# Altium PCB Grabber_DIOT.PCBDOC (part 6 of 7)
Units mm, origin at the board's own origin, x right, y up, seen from the top; angles counter-clockwise.
Board outline 222.9 x 100 mm, 4 copper layers (L1, P2, P3, L4), stack 1.6 mm thick; 235 components, 180 nets, 1032 pads, 664 vias.
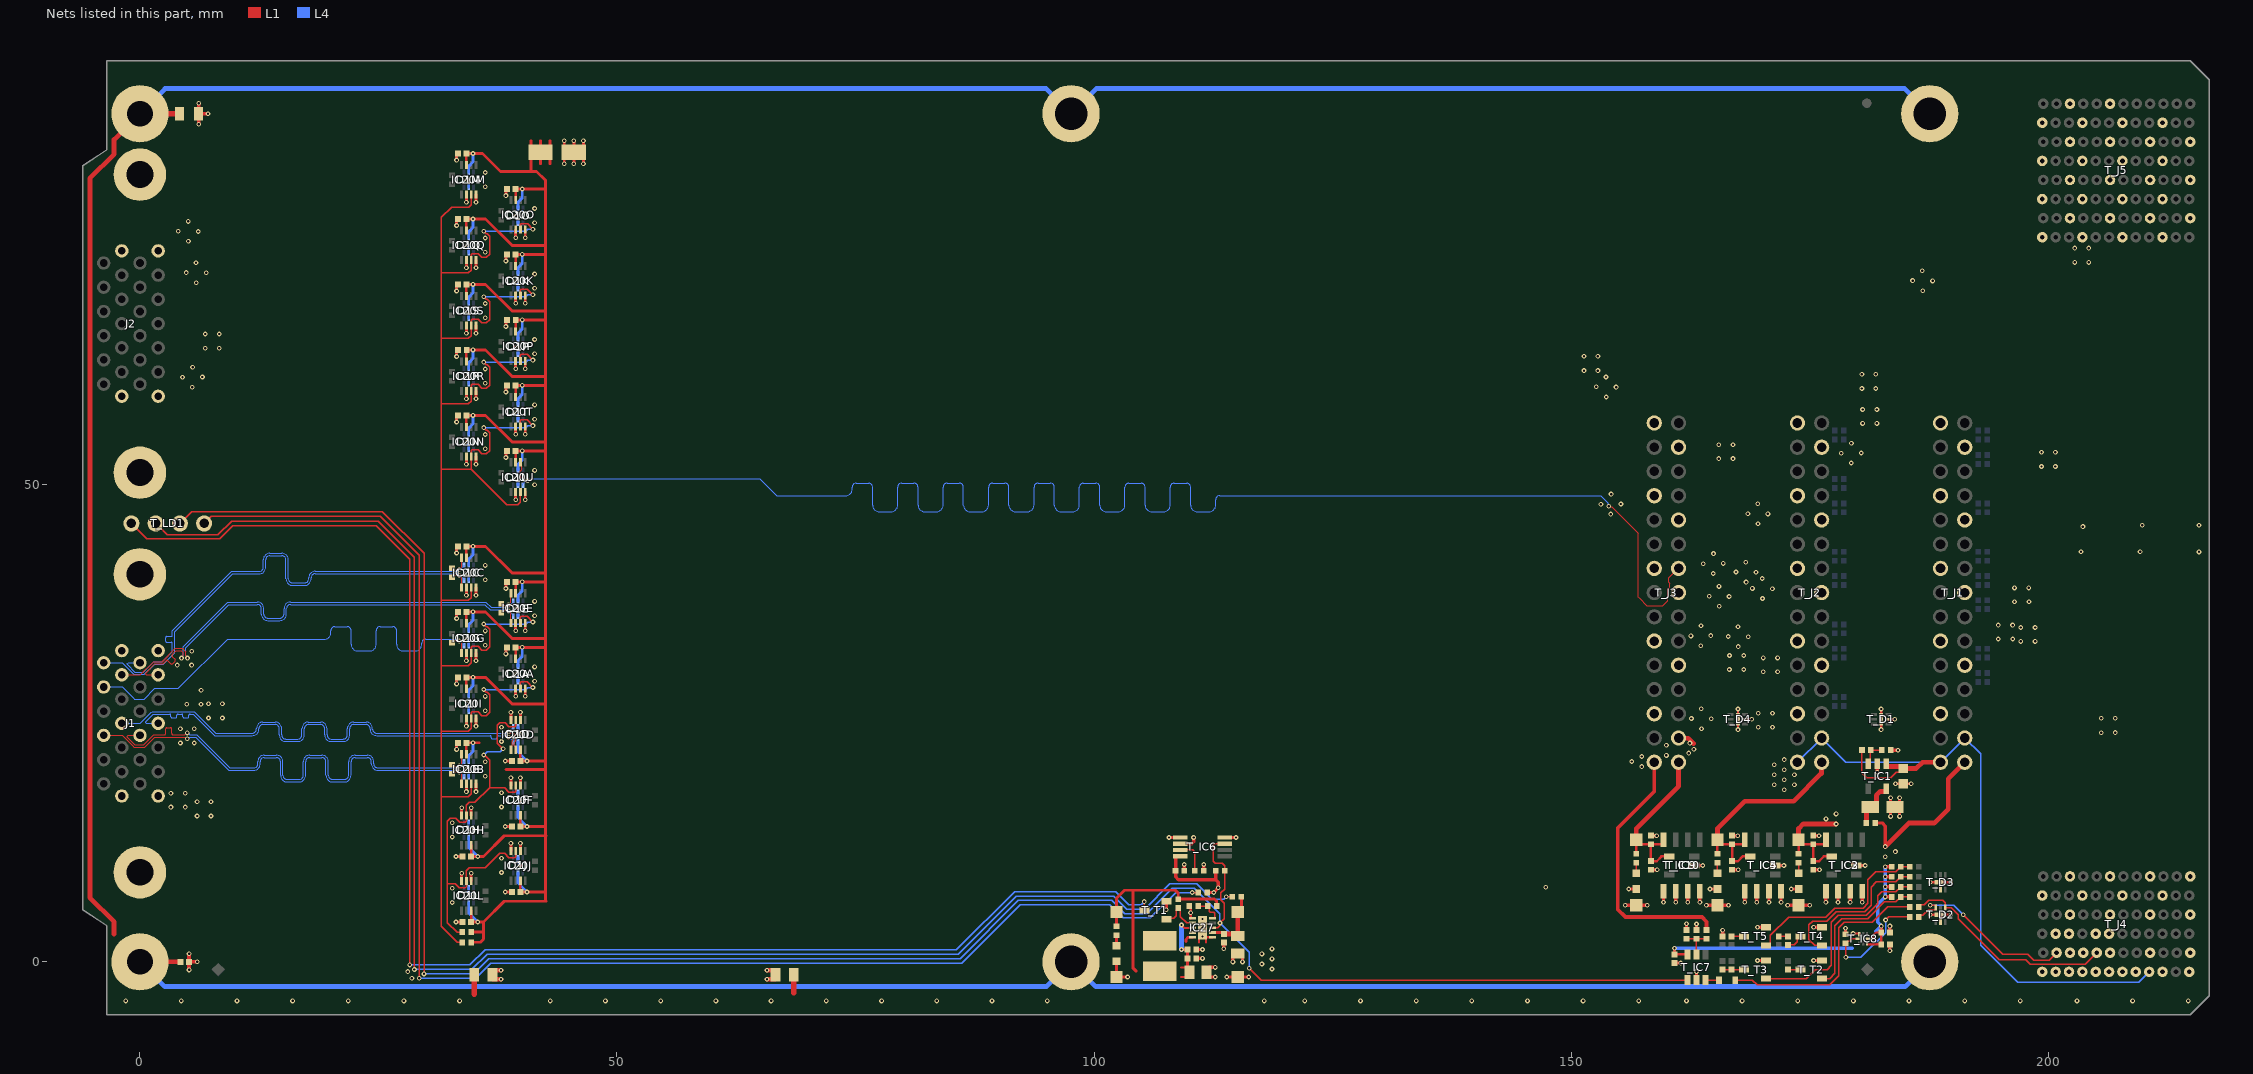
[diagram p7: the nets of this part, all layers, seen from the top]

## Via types
v1: diameter 0.5, hole 0.25, L1 to L4, tented both sides, 661 vias
v2: diameter 0.5, hole 0.25, L1 to L4, 3 vias

## Nets (pads, with @x,y where several pads share a name; then routed paths per layer and width w, separated by ;. In a path a pad name is that pad's centre, name@x,y a point inside that pad or via, vN(x,y) a via of type N, cw(c..) or ccw(c..) an arc to the next point about the centre after c; other vN are vias at no path point) (continued)
EEM_IO.LVDS_P20: D1U.1 IC20U.6 T_J3.14 | length 176.2
  L1 w0.127: IC20U.6@39.878,52.372 39.878,52.097 40.003,51.971 40.003,51.566 39.868,51.432 39.868,50.854 40.092,50.631 40.372,50.631 40.558,50.445 v1(40.633,50.445) ; v1(153.962,47.757) 154.016,47.704 154.278,47.704 154.477,47.505 154.696,47.286 157.059,44.923 157.059,38.229 157.134,38.154 157.952,37.336 159.611,37.336 160.127,37.852 160.127,39.019 160.364,39.256 160.364,39.685 160.344,39.705 160.269,39.78 160.269,40.239 T_J3.14@161.27,41.24
  L4 w0.127: D1U.1@40.13,49.969 40.13,50.104 40.217,50.19 40.277,50.19 40.532,50.445 v1(40.633,50.445) 40.708,50.445 40.894,50.631 64.959,50.631 66.722,48.868 73.793,48.868 73.983,48.868 ccw(c73.983,49.548) 74.663,49.548 74.663,49.746 cw(c75.088,49.746) 75.088,50.172 76.364,50.172 cw(c76.364,49.746) 76.79,49.746 76.79,47.873 ccw(c77.469,47.873) 77.469,47.194 78.745,47.194 ccw(c78.745,47.873) 79.425,47.873 79.425,49.746 cw(c79.85,49.746) 79.85,50.172 81.126,50.172 cw(c81.126,49.746) 81.552,49.746 81.552,47.873 ccw(c82.231,47.873) 82.231,47.194 83.507,47.194 ccw(c83.507,47.873) 84.187,47.873 84.187,49.746 cw(c84.612,49.746) 84.612,50.172 85.888,50.172 cw(c85.888,49.746) 86.314,49.746 86.314,47.873 ccw(c86.993,47.873) 86.993,47.194 88.269,47.194 ccw(c88.269,47.873) 88.949,47.873 88.949,49.746 cw(c89.374,49.746) 89.374,50.172 90.65,50.172 cw(c90.65,49.746) 91.076,49.746 91.076,47.873 ccw(c91.755,47.873) 91.755,47.194 93.031,47.194 ccw(c93.031,47.873) 93.711,47.873 93.711,49.746 cw(c94.136,49.746) 94.136,50.172 95.412,50.172 cw(c95.412,49.746) 95.838,49.746 95.838,47.873 ccw(c96.517,47.873) 96.517,47.194 97.793,47.194 ccw(c97.793,47.873) 98.473,47.873 98.473,49.746 cw(c98.898,49.746) 98.898,50.172 100.174,50.172 cw(c100.174,49.746) 100.6,49.746 100.6,47.873 ccw(c101.279,47.873) 101.279,47.194 102.555,47.194 ccw(c102.555,47.873) 103.235,47.873 103.235,49.746 cw(c103.66,49.746) 103.66,50.172 104.936,50.172 cw(c104.936,49.746) 105.362,49.746 105.362,47.873 ccw(c106.041,47.873) 106.041,47.194 107.317,47.194 ccw(c107.317,47.873) 107.997,47.873 107.997,49.746 cw(c108.422,49.746) 108.422,50.172 109.698,50.172 cw(c109.698,49.746) 110.124,49.746 110.124,47.873 ccw(c110.803,47.873) 110.803,47.194 112.079,47.194 ccw(c112.079,47.873) 112.759,47.873 112.759,48.443 cw(c113.184,48.443) 113.184,48.868 115.338,48.868 153.114,48.868 153.909,48.073 153.909,47.811 v1(153.962,47.757)
GA0: T_R13.1 T_R31.1 T_T2.1 | length 15.7
  L1 w0.152: T_T2.1@176.332,-1.764 177.109,-1.764 177.667,-1.206 177.667,3.792 178.385,4.51 181.086,4.51 182.853,6.277 184.031,6.277 184.54,6.787 T_R31.1@184.54,6.807 T_R13.1@185.51,6.807
GA1: T_R14.1 T_R32.1 T_T3.1 | length 22.2
  L1 w0.152: T_T3.1@170.448,-1.764 174.672,-1.764 175.622,-0.814 176.838,-0.814 177.274,-0.378 177.274,4.132 178.02,4.879 180.933,4.879 182.161,6.106 182.161,6.928 182.564,7.332 184.031,7.332 184.54,7.841 T_R32.1@184.54,7.861 T_R14.1@185.51,7.861
GA2: T_R16.1 T_R33.1 T_T4.1 | length 17
  L1 w0.152: T_T4.1@176.332,1.713 175.55,1.713 174.938,2.325 174.938,3.873 175.332,4.267 176.782,4.267 177.788,5.273 180.77,5.273 181.45,5.952 181.45,7.824 182.011,8.386 184.031,8.386 184.54,8.895 T_R33.1@184.54,8.915 T_R16.1@185.51,8.915
GA3: T_R18.1 T_R34.1 T_T5.1 | length 20.4
  L1 w0.152: T_T5.1@170.448,1.713 170.648,1.713 170.897,1.962 170.897,2.767 172.814,4.684 176.683,4.684 177.637,5.638 180.619,5.638 181.107,6.126 181.107,8.59 181.956,9.44 184.031,9.44 184.54,9.949 T_R34.1@184.54,9.969 T_R18.1@185.51,9.969
GND: C47A.1 C47B.1 C47C.1 C47D.1 C47E.1 C47F.1 C47G.1 C47H.1 C47I.1 C47J.1 C47K.1 C47L.1 C47M.1 C47N.1 C47O.1 C47P.1 C47Q.1 C47R.1 C47S.1 C47T.1 C47U.1 C59.1 C62.2 C65.1 C66.1 C67.1 C68.1 D1A.2 D1B.2 D1C.2 D1D.2 D1E.2 D1F.2 D1G.2 D1H.2 D1I.2 D1J.2 D1K.2 D1L.2 D1M.2 D1N.2 D1O.2 D1P.2 D1Q.2 D1R.2 D1S.2 D1T.2 D1U.2 IC20A.2 IC20A.4 IC20B.2 IC20B.4 IC20C.2 IC20C.4 IC20D.2 IC20D.4 IC20E.2 IC20E.4 IC20F.2 IC20F.4 IC20G.2 IC20G.4 IC20H.2 IC20H.4 IC20I.2 IC20I.4 IC20J.2 IC20J.4 IC20K.2 IC20K.4 IC20L.2 IC20L.4 IC20M.2 IC20M.4 IC20N.2 IC20N.4 IC20O.2 IC20O.4 IC20P.2 IC20P.4 IC20Q.2 IC20Q.4 IC20R.2 IC20R.4 IC20S.2 IC20S.4 IC20T.2 IC20T.4 IC20U.2 IC20U.4 IC27.1 IC27.6 IC27.11 J1.1 J1.13 J1.14 J1.26 J1.27 J1.28 J2.1 J2.13 J2.14 J2.26 J2.27 J2.28 R122.1 T_C1.1 T_C2.2 T_C3.1 T_C4.1 T_C5.1 T_C6.1 T_C7.1 T_C8.1 T_C9.1 T_C12.2 T_C13.2 T_C16.1 T_C20.1 T_C22.1 T_C23.1 T_D1.2 T_D1.7 T_D2.2 T_D2.7 T_D3.2 T_D3.7 T_D4.2 T_D4.7 T_IC1.2 T_IC2.2 T_IC3.1 T_IC3.2 T_IC3.3 T_IC3.4 T_IC4.2 T_IC5.1 T_IC5.2 T_IC5.3 T_IC5.4 T_IC6.4 T_IC6.5 T_IC6.6 T_IC7.2 T_IC8.4 T_IC9.2 T_IC10.1 T_IC10.2 T_IC10.3 T_IC10.4 T_J1.1 T_J1.4 T_J1.7 T_J1.10 T_J1.13 T_J1.16 T_J1.19 T_J1.22 T_J1.25 T_J2.1 T_J2.4 T_J2.7 T_J2.10 T_J2.13 T_J2.16 T_J2.19 T_J2.22 T_J2.25 T_J3.1 T_J3.4 T_J3.7 T_J3.10 T_J3.13 T_J3.16 T_J3.19 T_J3.22 T_J3.25 T_J4.A2 T_J4.A4 T_J4.A6 T_J4.C1 T_J4.C5 T_J4.D2 T_J4.D4 T_J4.D6 T_J4.F1 T_J4.F5 T_J4.G2 T_J4.G4 T_J4.G6 T_J4.I1 T_J4.I5 T_J4.J2 T_J4.J4 T_J4.J6 T_J4.L1 T_J4.L5 T_J5.A2 T_J5.A4 T_J5.A6 T_J5.C1 T_J5.C3 T_J5.C5 T_J5.C7 T_J5.D2 T_J5.D4 T_J5.D6 T_J5.F1 T_J5.F3 T_J5.F5 T_J5.F7 T_J5.G2 T_J5.G4 T_J5.G6 T_J5.G8 T_J5.I1 T_J5.I3 T_J5.I5 T_J5.I7 T_J5.J2 T_J5.J4 T_J5.J6 T_J5.J8 T_J5.L1 T_J5.L3 T_J5.L5 T_J5.L7 T_LD3.1 T_LD4.1 T_LD5.1 T_LD6.1 T_R7.1 T_R19.1 T_R25.1 T_R26.2 T_R27.2 T_R30.1 T_T1.2 T_T2.2 T_T3.2 T_T4.2 T_T5.2 T_TP6.1 T_TP7.1 T_TP8.1 T_TP9.1 T_TP10.1 | length 156.9
  L1 w0.152: IC20B.2@34.177,18.701 IC20B.2@34.218,18.66 ; IC20I.2@34.177,25.565 IC20I.2@34.218,25.524 ; IC20G.2@34.177,32.428 IC20G.2@34.218,32.387 ; IC20C.2@34.177,39.292 IC20C.2@34.218,39.251 ; IC20N.2@34.177,53.02 IC20N.2@34.218,52.979 ; IC20R.2@34.177,59.884 IC20R.2@34.218,59.843 ; IC20S.2@34.177,66.747 IC20S.2@34.218,66.706 ; IC20Q.2@34.177,73.611 IC20Q.2@34.218,73.57 ; IC20M.2@34.177,80.475 IC20M.2@34.218,80.434 ; IC20L.2@34.715,8.47 IC20L.2@34.756,8.429 ; IC20H.2@34.715,15.334 IC20H.2@34.756,15.293 ; IC20A.2@39.339,28.708 IC20A.2@39.38,28.667 ; IC20E.2@39.339,35.572 IC20E.2@39.38,35.531 ; IC20U.2@39.339,49.3 IC20U.2@39.38,49.259 ; IC20T.2@39.339,56.164 IC20T.2@39.38,56.122 ; IC20P.2@39.339,63.027 IC20P.2@39.38,62.986 ; IC20K.2@39.339,69.891 IC20K.2@39.38,69.85 ; IC20O.2@39.339,76.755 IC20O.2@39.38,76.714 ; IC20J.2@39.878,11.614 IC20J.2@39.919,11.573 ; IC20F.2@39.878,18.477 IC20F.2@39.919,18.436 ; IC20D.2@39.878,25.341 IC20D.2@39.919,25.3
  L1 w0.2: 111.001,2.024 111.001,3.201 v2(111.369,3.569) ; 111.737,2.024 IC27.11@111.737,3.201
  L1 w0.25: R122.1@109.968,5.85 110.124,5.694 v1(110.124,5.144) 110.124,4.594 IC27.6@110.149,4.569 ; IC27.11@111.759,2.569 IC27.1@112.419,2.569 ; v1(167.5,24.345) v1(167.5,26.497) ; T_D4.2@168.259,25.421 v1(168.945,25.421) ; v1(179.571,2.974) T_IC8.4@180.222,2.974 ; v1(182.5,24.345) T_D1.7@182.5,25.421 v1(182.5,26.497) ; T_D1.2@183.26,25.421 v1(183.945,25.421) ; v1(187.654,4.933) T_D2.7@188.731,4.933 v1(189.807,4.933) ; v1(187.654,8.332) T_D3.7@188.731,8.332 v1(189.807,8.332) ; T_D2.2@188.731,4.173 T_D2.7@188.731,4.859 ; T_D3.2@188.731,7.572 T_D3.7@188.731,8.257
  L1 w0.3: v1(33.123,4.173) C47L.1@33.815,4.173 ; v1(33.123,11.037) C47H.1@33.815,11.037 ; v1(33.191,22.264) C47B.1@33.191,22.957 ; v1(33.191,29.128) C47I.1@33.191,29.82 ; v1(33.191,35.992) C47G.1@33.191,36.684 ; v1(33.191,42.856) C47C.1@33.191,43.548 ; v1(33.191,56.583) C47N.1@33.191,57.276 ; v1(33.191,63.447) C47R.1@33.191,64.139 ; v1(33.191,70.311) C47S.1@33.191,71.003 ; v1(33.191,77.175) C47Q.1@33.191,77.867 ; v1(33.191,84.038) C47M.1@33.191,84.731 ; IC20L.4@33.715,8.47 v1(33.715,9.289) ; IC20H.4@33.715,15.334 v1(33.715,16.153) ; v1(34.218,17.84) IC20B.2@34.218,18.66 ; v1(34.218,24.704) IC20I.2@34.218,25.524 ; v1(34.218,31.568) IC20G.2@34.218,32.387 ; v1(34.218,38.432) IC20C.2@34.218,39.251 ; v1(34.218,52.159) IC20N.2@34.218,52.979 ; v1(34.218,59.023) IC20R.2@34.218,59.843 ; v1(34.218,65.887) IC20S.2@34.218,66.706 ; v1(34.218,72.751) IC20Q.2@34.218,73.57 ; v1(34.218,79.615) IC20M.2@34.218,80.434 ; IC20L.2@34.715,8.47 v1(34.715,9.289) ; IC20H.2@34.715,15.334 v1(34.715,16.153) ; v1(35.218,17.84) IC20B.4@35.218,18.66 ; v1(35.218,24.704) IC20I.4@35.218,25.524 ; v1(35.218,31.568) IC20G.4@35.218,32.387 ; v1(35.218,38.432) IC20C.4@35.218,39.251 ; v1(35.218,52.159) IC20N.4@35.218,52.979 ; v1(35.218,59.023) IC20R.4@35.218,59.843 ; v1(35.218,65.887) IC20S.4@35.218,66.706 ; v1(35.218,72.751) IC20Q.4@35.218,73.57 ; v1(35.218,79.615) IC20M.4@35.218,80.434 ; v1(38.285,7.317) C47J.1@38.978,7.317 ; v1(38.285,14.181) C47F.1@38.978,14.181 ; v1(38.285,21.044) C47D.1@38.978,21.044 ; v1(38.353,32.272) C47A.1@38.353,32.964 ; v1(38.353,39.135) C47E.1@38.353,39.828 ; v1(38.353,52.863) C47U.1@38.353,53.556 ; v1(38.353,59.727) C47T.1@38.353,60.419 ; v1(38.353,66.591) C47P.1@38.353,67.283 ; v1(38.353,73.455) C47K.1@38.353,74.147 ; v1(38.353,80.318) C47O.1@38.353,81.011 ; IC20J.4@38.878,11.614 v1(38.878,12.433) ; IC20F.4@38.878,18.477 v1(38.878,19.297) ; IC20D.4@38.878,25.341 v1(38.878,26.161) ; v1(39.38,27.848) IC20A.2@39.38,28.667 ; v1(39.38,34.712) IC20E.2@39.38,35.531 ; v1(39.38,48.439) IC20U.2@39.38,49.259 ; v1(39.38,55.303) IC20T.2@39.38,56.122 ; v1(39.38,62.167) IC20P.2@39.38,62.986 ; v1(39.38,69.031) IC20K.2@39.38,69.85 ; v1(39.38,75.894) IC20O.2@39.38,76.714 ; IC20J.2@39.878,11.614 v1(39.878,12.433) ; IC20F.2@39.878,18.477 v1(39.878,19.297) ; IC20D.2@39.878,25.341 v1(39.878,26.161) ; v1(40.38,27.848) IC20A.4@40.38,28.667 ; v1(40.38,34.712) IC20E.4@40.38,35.531 ; v1(40.38,48.439) IC20U.4@40.38,49.259 ; v1(40.38,55.303) IC20T.4@40.38,56.122 ; v1(40.38,62.167) IC20P.4@40.38,62.986 ; v1(40.38,69.031) IC20K.4@40.38,69.85 ; v1(40.38,75.894) IC20O.4@40.38,76.714 ; v1(44.475,83.656) C62.2@44.475,84.475 ; C62.2@44.475,85.237 v1(44.475,86.057) ; v1(45.475,83.656) C62.2@45.475,84.475 ; C62.2@45.475,85.237 v1(45.475,86.057) ; v1(46.475,83.656) C62.2@46.475,84.475 ; C62.2@46.475,85.237 v1(46.475,86.057) ; v1(183.495,15.246) T_C2.2@183.495,16.065 ; T_C2.2@183.495,16.369 v1(183.495,17.189) ; v1(184.011,18.666) T_C1.1@184.83,18.666 v1(185.65,18.666) ; v1(184.44,15.246) T_C2.2@184.44,16.065 ; T_C2.2@184.44,16.369 v1(184.44,17.189)
  L1 w0.35: T_LD3.1@102.362,0.052 T_TP6.1@102.362,-1.589 v1(103.521,-1.589) ; v1(107.576,5.452) T_T1.2@107.576,6.357 ; v1(107.858,13.029) T_IC6.5@109.043,13.029 ; T_IC6.6@109.043,12.379 110.235,12.379 110.44,12.584 v1(110.44,13.029) ; T_C8.1@109.457,9.545 v1(109.457,10.197) ; C59.1@110.717,0.361 v1(111.369,0.361) ; C65.1@110.717,1.287 v1(111.369,1.287) ; T_R25.1@111.509,9.546 v1(111.509,10.197) ; C66.1@112.049,-1.589 v1(112.701,-1.589) ; C66.1@112.049,-0.587 v1(112.701,-0.587) ; v1(113.608,1.362) C67.1@113.608,2.013 ; T_IC6.4@113.693,13.029 v1(114.878,13.029) ; v1(113.903,-1.589) T_TP10.1@115.062,-1.589 v1(116.221,-1.589) ; v1(114.561,-0.012) C68.1@114.561,0.639 ; v1(115.563,-0.012) C68.1@115.563,0.639 ; v1(155.681,5.935) T_TP9.1@156.84,5.935 v1(158,5.935) ; v1(156.062,7.627) T_LD6.1@156.84,7.627 ; T_C7.1@158.372,9.647 v1(159.023,9.647) ; T_C9.1@158.372,13.225 v1(158.973,13.225) v1@159.023,13.225 ; v1(159.698,6.237) T_IC10.1@159.698,7.397 ; T_C20.1@160.853,-0.128 v1(161.504,-0.128) ; v1(160.968,6.237) T_IC10.2@160.968,7.143 ; T_R30.1@162.1,3.334 v1(162.1,3.986) ; v1(162.238,6.237) T_IC10.3@162.238,7.143 ; T_IC9.2@162.903,10.097 v1(163.808,10.097) ; T_IC7.2@163.151,-1.928 v1(163.151,-1.023) ; T_C13.2@163.151,3.314 v1(163.151,3.966) ; v1(163.508,6.237) T_IC10.4@163.508,7.143 ; v1(164.19,5.935) T_TP8.1@165.349,5.935 v1(166.509,5.935) ; v1(164.571,7.627) T_LD5.1@165.349,7.627 ; T_C16.1@165.891,2.663 v1(165.891,3.315) ; T_C5.1@166.881,9.647 v1(167.532,9.647) ; T_C6.1@166.881,13.225 v1(167.482,13.225) v1@167.532,13.225 ; v1(168.207,6.237) T_IC5.1@168.207,7.397 ; v1(169.477,6.237) T_IC5.2@169.477,7.143 ; v1(169.543,0.136) T_T3.2@170.448,0.136 ; v1(169.543,3.613) T_T5.2@170.448,3.613 ; v1(170.747,6.237) T_IC5.3@170.747,7.143 ; T_IC4.2@171.412,10.097 v1(172.317,10.097) ; v1(172.017,6.237) T_IC5.4@172.017,7.143 ; v1(172.699,5.935) T_TP7.1@173.858,5.935 v1(175.018,5.935) ; v1(173.08,7.627) T_LD4.1@173.858,7.627 ; T_C3.1@175.39,9.647 v1(176.041,9.647) ; T_C4.1@175.39,13.225 v1(175.991,13.225) v1@176.041,13.225 ; v1(175.427,0.136) T_T2.2@176.332,0.136 ; v1(175.427,3.613) T_T4.2@176.332,3.613 ; v1(176.716,6.237) T_IC3.1@176.716,7.397 ; v1(177.986,6.237) T_IC3.2@177.986,7.143 ; T_R19.1@178.773,2.872 v1(178.773,3.524) ; v1(179.256,6.237) T_IC3.3@179.256,7.143 ; T_IC2.2@179.921,10.097 v1(180.826,10.097) ; v1(180.526,6.237) T_IC3.4@180.526,7.143 ; v1(182.105,19.861) T_IC1.2@182.105,20.766 ; v1(183.422,1.169) T_C23.1@183.422,1.82 ; T_C22.1@183.422,3.09 v1(183.423,3.742) ; T_R7.1@183.495,22.184 v1(184.273,22.184)
  L1 w0.4: v1(5.15,-0.85) T_C12.2@5.15,0 ; v1(5.15,0.85) T_C12.2@5.15,0 ; v1(6,0) T_C12.2@5.15,0 ; v1(6.152,87.796) T_R26.2@6.152,88.9 ; v1(6.152,90.004) T_R26.2@6.152,88.9 ; v1(7.129,88.9) T_R26.2@6.152,88.9
  L1 w0.5: v1(65.725,-1.829) T_R27.2@66.581,-1.829 ; v1(65.725,-0.878) T_R27.2@66.581,-0.878
  L4 w0.3: v1(34.267,20.2) 34.267,20.145 34.468,19.945 D1B.2@34.468,19.42 ; v1(34.267,27.063) 34.267,27.009 34.468,26.809 D1I.2@34.468,26.284 ; v1(34.267,33.927) 34.267,33.873 34.468,33.673 D1G.2@34.468,33.147 ; v1(34.267,40.791) 34.267,40.737 34.468,40.537 D1C.2@34.468,40.011 ; v1(34.267,54.519) 34.267,54.464 34.468,54.264 D1N.2@34.468,53.739 ; v1(34.267,61.382) 34.267,61.328 34.468,61.128 D1R.2@34.468,60.603 ; v1(34.267,68.246) 34.267,68.192 34.468,67.992 D1S.2@34.468,67.466 ; v1(34.267,75.11) 34.267,75.056 34.468,74.856 D1Q.2@34.468,74.33 ; v1(34.267,81.974) 34.267,81.92 34.468,81.72 D1M.2@34.468,81.194 ; D1L.2@34.465,7.76 34.465,7.234 34.665,7.034 v1(34.665,6.98) ; D1H.2@34.465,14.623 34.465,14.098 34.665,13.898 v1(34.665,13.844) ; v1(39.43,30.157) 39.43,30.103 39.63,29.903 D1A.2@39.63,29.377 ; v1(39.43,37.021) 39.43,36.967 39.63,36.767 D1E.2@39.63,36.241 ; v1(39.43,50.748) 39.43,50.694 39.63,50.494 D1U.2@39.63,49.969 ; v1(39.43,57.612) 39.43,57.558 39.63,57.358 D1T.2@39.63,56.833 ; v1(39.43,64.476) 39.43,64.422 39.63,64.222 D1P.2@39.63,63.696 ; v1(39.43,71.34) 39.43,71.286 39.63,71.086 D1K.2@39.63,70.56 ; v1(39.43,78.204) 39.43,78.15 39.63,77.949 D1O.2@39.63,77.424 ; D1J.2@39.628,10.904 39.628,10.378 39.828,10.178 v1(39.828,10.124) ; D1F.2@39.628,17.767 39.628,17.242 39.828,17.042 v1(39.828,16.988) ; D1D.2@39.628,24.631 39.628,24.106 39.828,23.906 v1(39.828,23.851)
  other v1: 28.504,-1.726 28.067,-1.022 32.734,6.219 32.734,7.722 147.362,7.813 37.896,9.364 37.896,10.863 32.734,13.084 32.734,14.583 5.99,15.282 7.448,15.28 3.24,16.215 4.742,16.215 37.896,16.228 5.99,16.781 7.448,16.782 3.242,17.673 4.741,17.673 37.896,17.727 36.199,19.46 36.199,20.959 5.694,22.935 4.236,22.937 37.896,23.092 205.588,24.013 207.046,24.025 4.236,24.435 5.694,24.437 163.677,24.44 169.617,24.585 171.119,24.585 37.896,24.591 164.707,25.472 162.615,25.502 205.588,25.54 207.046,25.527 7.184,25.561 8.642,25.559 169.619,26.043 171.118,26.043 36.199,26.324 163.647,26.532 4.902,26.995 6.401,26.995 7.184,27.059 8.642,27.061 36.199,27.823 6.402,28.454 41.362,29.418 170.156,30.401 171.655,30.401 166.606,30.646 168.108,30.646 41.362,30.916 3.914,31.103 5.413,31.103 170.156,31.859 171.655,31.859 166.608,32.104 168.107,32.104 5.414,32.561 167.537,33.039 163.595,33.134 36.199,33.188 197.141,33.582 198.643,33.582 194.775,33.837 196.302,33.837 168.568,34.071 166.478,34.099 162.563,34.164 164.655,34.193 36.199,34.687 197.142,35.04 198.641,35.04 167.509,35.13 163.625,35.226 194.789,35.295 196.288,35.295 41.362,36.281 165.541,37.259 196.49,37.736 198.003,37.736 41.362,37.78 170.074,38.083 166.571,38.291 164.479,38.321 171.106,39.113 169.014,39.143 196.49,39.194 197.989,39.194 165.511,39.351 168.356,39.801 36.199,40.052 170.044,40.175 164.9,40.698 169.385,40.833 167.293,40.863 36.199,41.55 163.868,41.728 165.96,41.758 168.326,41.893 164.93,42.79 215.831,42.965 203.461,42.99 209.653,42.978 203.659,45.62 215.831,45.759 209.882,45.772 169.603,45.916 154.169,46.933 170.635,46.946 168.543,46.976 153.137,47.963 155.229,47.993 169.573,48.008 154.199,49.025 41.362,50.009 41.362,51.508 199.315,51.921 200.773,51.921 179.367,52.281 165.476,52.747 166.974,52.747 178.327,53.307 180.419,53.337 199.315,53.419 200.773,53.419 36.199,53.779 165.474,54.205 166.976,54.205 179.387,54.367 36.199,55.278 180.562,56.44 182.061,56.44 41.362,56.873 180.562,57.898 182.061,57.898 41.362,58.372 153.699,59.206 180.49,60.1 181.948,60.1 5.482,60.233 154.729,60.238 152.637,60.268 36.199,60.643 4.452,61.265 6.544,61.295 153.669,61.298 180.49,61.599 181.948,61.599 151.359,61.972 152.818,61.974 36.199,62.142 5.512,62.325 152.818,63.473 151.359,63.474 41.362,63.737 6.84,64.306 8.298,64.304 41.362,65.236 6.84,65.805 8.298,65.807 36.199,67.507 36.199,69.006 186.865,70.343 41.362,70.601 5.903,71.186 187.897,71.373 185.805,71.403 41.362,72.099 6.934,72.217 4.843,72.245 186.826,72.444 5.874,73.277 202.802,73.315 204.26,73.315 36.199,74.371 202.802,74.814 204.26,74.814 5.079,75.52 36.199,75.869 6.11,76.551 4.019,76.58 41.362,77.464 5.05,77.611 41.362,78.963 36.199,81.234 36.199,82.733
  other v2: 111.369,2.65 111.369,4.489
NetIC27_5: IC27.5 R121.1 R122.2 | length 3
  L1 w0.152: R122.2@110.908,5.85 R121.1@111.928,5.85 112.07,5.708 112.07,5.307 112.159,5.218 112.529,5.218 112.668,5.079 112.668,4.643 112.594,4.569 IC27.5@112.419,4.569
NetIC27_9: IC27.9 L2.1
NetT_C2_1: T_C2.1 T_IC1.5 T_R2.1 | length 5
  L1 w0.5: T_R2.1@180.959,14.556 180.959,15.842 181.334,16.217 T_C2.1@181.367,16.217 181.642,16.217 182.017,16.592 182.017,17.466 182.418,17.866 183.005,17.866 183.055,17.916 T_IC1.5@183.055,18.166
NetT_C13_1: T_C13.1 T_IC7.5 T_R29.2 T_R30.2 | length 3.8
  L1 w0.152: T_R30.2@162.1,2.394 T_C13.1@163.151,2.394 ; T_IC7.5@163.151,0.772 T_C13.1@163.151,2.394 ; T_C13.1@163.151,2.414 T_C13.1@163.151,2.394 ; T_R29.2@164.214,2.394 T_C13.1@163.151,2.394
NetT_C14_1: T_C14.1 T_C21.2 | length 1
  L1 w0.152: T_C14.1@171.775,2.663 T_C21.2@172.726,2.663
NetT_C15_1: T_C15.1 T_T5.3 | length 1.3
  L1 w0.152: T_C15.1@166.841,2.663 T_T5.3@168.148,2.663
NetT_C17_1: T_C17.1 T_T2.3 | length 1.3
  L1 w0.152: T_C17.1@172.726,-0.814 T_T2.3@174.032,-0.814
NetT_C18_1: T_C18.1 T_C19.1 T_T3.3 | length 2.3
  L1 w0.152: T_C18.1@165.891,-0.814 T_C19.1@166.841,-0.814 T_T3.3@168.148,-0.814
NetT_C21_1: T_C21.1 T_T4.3 | length 1.9
  L1 w0.152: T_C21.1@172.726,1.763 173.409,1.763 173.73,2.084 173.73,2.414 173.979,2.663 T_T4.3@174.032,2.663
NetT_D2_4: T_D2.4 T_J4.H2 T_R15.2 | length 22.8
  L1 w0.152: T_R15.2@186.45,5.752 186.45,5.772 186.664,5.986 187.022,5.986 187.49,6.454 188.966,6.454 189.231,6.189 T_D2.4@189.231,5.693 189.858,5.693 190.6,4.951 190.6,4.527 194.9,0.227 197.649,0.227 198.116,-0.24 203.91,-0.24 T_J4.H2@205.1,0.95
NetT_D2_6: T_D2.6 T_J4.K2 T_R17.2 | length 18.6
  L1 w0.152: T_R17.2@186.45,4.698 186.612,4.861 186.879,4.861 187.482,5.463 T_D2.6@188.157,5.463 ; v1(187.654,5.932) T_D2.6@188.26,5.932 ; v1(191.105,4.933) 195.233,0.805 197.865,0.805 198.508,0.162 200.112,0.162 T_J4.K2@200.855,0.905 ; T_J4.K2@200.9,0.86 T_J4.K2@200.9,0.95
  L4 w0.152: v1(187.654,5.932) 190.107,5.932 v1(191.105,4.933)
NetT_D6_2: T_D6.2 T_IC7.3 | length 1.5
  L1 w0.152: T_IC7.3@164.101,-1.928 T_D6.2@165.555,-1.928
NetT_IC1_3: T_IC1.3 T_R4.2 T_R7.2 | length 2.7
  L1 w0.152: T_IC1.3@181.155,20.766 181.359,20.97 181.359,22.103 T_R4.2@181.441,22.184 T_R7.2@182.555,22.184
NetT_IC6_7: T_IC6.7 T_R25.2 | length 3.6
  L1 w0.152: T_IC6.7@109.043,11.729 110.344,11.729 110.569,11.504 T_R25.2@110.569,9.546
NetT_LD1_1: T_LD1.1 T_T1.3 | length 156.2
  L1 w0.152: T_LD1.1@-0.9,45.95 0.723,44.327 8.345,44.327 9.717,45.699 24.783,45.699 28.267,42.215 v1(28.267,-0.324) ; T_T1.3@105.276,5.407 v1(105.276,6.313)
  L4 w0.152: v1@28.271,-0.327 34.591,-0.327 36.18,1.262 85.573,1.262 91.679,7.368 102.254,7.368 103.622,5.999 104.963,5.999 v1(105.276,6.313)
NetT_LD1_2: T_LD1.2 T_R3.1 | length 164.4
  L1 w0.152: T_LD1.2@1.64,45.95 2.848,44.742 8.173,44.742 9.625,46.194 24.988,46.194 28.763,42.42 v1(28.763,-0.8) ; v1(113.86,6.818) T_R3.1@114.508,6.818
  L4 w0.152: v1@28.77,-0.801 34.787,-0.801 36.376,0.788 85.769,0.788 91.876,6.894 102.058,6.894 103.426,5.526 105.331,5.526 107.966,8.16 110.745,8.16 112.35,6.554 113.597,6.554 v1(113.86,6.818)
NetT_LD1_4: T_LD1.4 T_R1.1 | length 155.6
  L1 w0.152: T_LD1.4@6.72,45.95 7.484,46.714 25.203,46.714 29.282,42.635 v1(29.282,-1.726) 29.282,-1.852 v1@29.286,-1.855 ; v1(110.3,7.264) T_R1.1@110.948,7.264 T_R1.1@110.952,7.264
  L4 w0.152: v1(29.282,-1.726) 35.171,-1.726 36.759,-0.137 86.153,-0.137 92.259,5.969 101.675,5.969 103.043,4.601 105.881,4.601 108.544,7.264 v1(110.3,7.264)
NetT_LD3_2: T_LD3.2 T_R5.1 | length 1.1
  L1 w0.3: T_LD3.2@102.362,1.702 T_R5.1@102.362,2.793
NetT_LD4_2: T_LD4.2 T_R6.1 | length 1.1
  L1 w0.152: T_LD4.2@173.858,9.277 T_R6.1@173.858,10.364
NetT_LD5_2: T_LD5.2 T_R9.1 | length 1.1
  L1 w0.152: T_LD5.2@165.349,9.277 T_R9.1@165.349,10.364
NetT_LD6_2: T_LD6.2 T_R10.1 | length 1.1
  L1 w0.152: T_LD6.2@156.84,9.277 T_R10.1@156.84,10.364
P3V3: C47A.2 C47B.2 C47C.2 C47D.2 C47E.2 C47F.2 C47G.2 C47H.2 C47I.2 C47J.2 C47K.2 C47L.2 C47M.2 C47N.2 C47O.2 C47P.2 C47Q.2 C47R.2 C47S.2 C47T.2 C47U.2 C59.2 C62.1 C65.2 C66.2 D1A.5 D1B.5 D1C.5 D1D.5 D1E.5 D1F.5 D1G.5 D1H.5 D1I.5 D1J.5 D1K.5 D1L.5 D1M.5 D1N.5 D1O.5 D1P.5 D1Q.5 D1R.5 D1S.5 D1T.5 D1U.5 IC20A.7 IC20B.7 IC20C.7 IC20D.7 IC20E.7 IC20F.7 IC20G.7 IC20H.7 IC20I.7 IC20J.7 IC20K.7 IC20L.7 IC20M.7 IC20N.7 IC20O.7 IC20P.7 IC20Q.7 IC20R.7 IC20S.7 IC20T.7 IC20U.7 IC27.8 IC27.10 L2.2 R1.2 R8.1 R9.1 R121.2 T_R5.2 T_TP2.1 | length 318.9
  L1 w0.2: 109.115,-1.589 C66.2@109.766,-1.589 ; 109.115,-0.587 109.646,-0.587 C66.2@109.766,-0.587
  L1 w0.203: v1(109.166,3.855) 109.458,3.564 IC27.8@110.313,3.564
  L1 w0.254: IC20B.7@34.218,21.76 C47B.2@34.218,22.957 ; IC20I.7@34.218,28.624 C47I.2@34.218,29.82 ; IC20G.7@34.218,35.487 C47G.2@34.218,36.684 ; IC20C.7@34.218,42.351 C47C.2@34.218,43.548 ; IC20N.7@34.218,56.079 C47N.2@34.218,57.276 ; IC20R.7@34.218,62.943 C47R.2@34.218,64.139 ; IC20S.7@34.218,69.806 C47S.2@34.218,71.003 ; IC20Q.7@34.218,76.67 C47Q.2@34.218,77.867 ; IC20M.7@34.218,83.534 C47M.2@34.218,84.731 ; IC20L.7@34.698,5.353 34.715,5.37 C47L.2@34.715,4.173 ; IC20H.7@34.698,12.216 34.715,12.234 C47H.2@34.715,11.037 ; C47A.2@39.38,32.964 IC20A.7@39.38,31.767 IC20A.7@39.397,31.784 ; C47E.2@39.38,39.828 IC20E.7@39.38,38.631 IC20E.7@39.397,38.648 ; IC20U.7@39.38,52.359 C47U.2@39.38,53.556 ; IC20T.7@39.38,59.222 C47T.2@39.38,60.419 ; IC20P.7@39.38,66.086 C47P.2@39.38,67.283 ; IC20K.7@39.38,72.95 C47K.2@39.38,74.147 ; C47O.2@39.38,81.011 39.38,79.814 IC20O.7@39.397,79.831 ; IC20J.7@39.861,8.496 39.878,8.514 C47J.2@39.878,7.317 ; IC20F.7@39.861,15.36 39.878,15.377 C47F.2@39.878,14.181 ; IC20D.7@39.861,22.224 39.878,22.241 C47D.2@39.878,21.044
  L1 w0.3: C47B.2@34.218,22.957 v1(34.91,22.957) 35.559,22.957 ; C47I.2@34.218,29.82 v1(34.91,29.82) 36.23,29.82 39.02,27.03 42.502,27.03 ; C47G.2@34.218,36.684 v1(34.91,36.684) 36.23,36.684 39.02,33.894 42.502,33.894 ; C47C.2@34.218,43.548 v1(34.91,43.548) 36.23,43.548 39.02,40.758 42.502,40.758 ; C47N.2@34.218,57.276 v1(34.91,57.276) 36.23,57.276 39.02,54.486 42.502,54.486 ; C47R.2@34.218,64.139 C47R.2@34.249,64.139 v1(34.91,64.139) 36.23,64.139 39.02,61.349 42.502,61.349 ; C47S.2@34.218,71.003 v1(34.91,71.003) 36.23,71.003 39.02,68.213 42.502,68.213 ; C47Q.2@34.218,77.867 v1(34.91,77.867) 36.23,77.867 39.02,75.077 42.502,75.077 ; C47M.2@34.218,84.731 v1(34.91,84.731) 35.909,84.731 37.788,82.852 40.975,82.852 ; C47L.2@34.715,4.173 v1(35.408,4.173) 36.005,4.173 ; C47H.2@34.715,11.037 v1(35.408,11.037) 36.005,11.037 38.179,13.211 42.502,13.211 ; R8.1@34.735,2.044 35.676,2.044 36.005,2.373 36.005,3.109 ; R9.1@34.735,3.109 36.005,3.109 ; 38.349,20.167 42.502,20.167 ; C47A.2@39.38,32.964 v1(40.073,32.964) 42.502,32.964 ; C47E.2@39.38,39.828 v1(40.073,39.828) 42.502,39.828 ; C47U.2@39.38,53.556 v1(40.073,53.556) 42.502,53.556 ; C47T.2@39.38,60.419 v1(40.073,60.419) 42.502,60.419 ; C47P.2@39.38,67.283 C47P.2@39.384,67.283 v1(40.073,67.283) 42.502,67.283 ; C47K.2@39.38,74.147 v1(40.073,74.147) 42.502,74.147 ; C47O.2@39.38,81.011 v1(40.073,81.011) 42.502,81.011 ; C47J.2@39.878,7.317 v1(40.57,7.317) 42.502,7.317 ; C47F.2@39.878,14.181 v1(40.57,14.181) 42.502,14.181 ; C47D.2@39.878,21.044 v1(40.57,21.044) 42.502,21.044 ; C62.1@40.975,84.475 40.975,82.852 ; C62.1@40.975,85.237 40.975,86.057 ; 41.975,83.656 C62.1@41.975,84.475 ; C62.1@41.975,85.237 41.975,86.057 ; 42.548,6.347 42.502,6.347 ; 42.548,13.211 42.502,13.211 ; 42.975,83.656 C62.1@42.975,84.475 ; C62.1@42.975,85.237 42.975,86.057 ; T_R5.2@102.362,3.733 T_TP2.1@102.362,5.227 102.362,6.664 103.206,7.508 104.069,7.508 ; 104.428,-0.988 104.069,-0.629 104.069,7.508 ; C66.2@109.633,-0.574 109.646,-0.587 C66.2@109.817,-0.758 ; 109.634,2.136 109.634,2.347 109.856,2.569 IC27.10@110.319,2.569 ; C65.2@109.775,1.329 C65.2@109.817,1.287 C59.2@109.817,0.361 C66.2@109.817,-0.758 ; C66.2@110.008,-1.088 109.817,-0.898 C66.2@109.817,-0.758 ; R121.2@112.868,5.85 112.868,6.35 112.637,6.581 R1.2@108.83,6.581 108.83,7.196 108.517,7.508 104.069,7.508 ; 36.005,3.109 36.005,4.173 ; 36.005,4.173 38.179,6.347 42.502,6.347 ; 40.975,82.852 41.569,82.852 42.502,81.919 42.502,81.011 ; 42.502,6.347 42.502,7.317 ; 42.502,7.317 42.502,13.211 ; 42.502,13.211 42.502,14.181 ; 42.502,14.181 42.502,20.167 ; 42.502,20.167 42.502,21.044 ; 42.502,21.044 42.502,27.03 ; 42.502,27.03 42.502,32.964 ; 42.502,32.964 42.502,33.894 ; 42.502,33.894 42.502,39.828 ; 42.502,39.828 42.502,40.758 ; 42.502,40.758 42.502,53.556 ; 42.502,53.556 42.502,54.486 ; 42.502,54.486 42.502,60.419 ; 42.502,60.419 42.502,61.349 ; 42.502,61.349 42.502,67.283 ; 42.502,67.283 42.502,68.213 ; 42.502,68.213 42.502,74.147 ; 42.502,74.147 42.502,75.077 ; 42.502,75.077 42.502,81.011
  L1 w0.35: v1(109.166,1.287) C65.2@109.817,1.287
  L4 w0.3: D1L.5@34.465,6.18 34.465,5.115 v1(35.408,4.173) ; D1H.5@34.465,13.044 34.465,11.979 v1(35.408,11.037) ; D1B.5@34.468,21 34.468,21.615 34.91,22.057 v1(34.91,22.957) ; D1I.5@34.468,27.864 34.468,28.478 34.91,28.921 v1(34.91,29.82) ; D1G.5@34.468,34.727 34.468,35.342 34.91,35.785 v1(34.91,36.684) ; D1C.5@34.468,41.591 34.468,42.206 34.91,42.648 v1(34.91,43.548) ; D1N.5@34.468,55.319 34.468,55.934 34.91,56.376 v1(34.91,57.276) ; D1R.5@34.468,62.183 34.468,62.797 34.91,63.24 v1(34.91,64.139) ; D1S.5@34.468,69.046 34.468,69.661 34.91,70.104 v1(34.91,71.003) ; D1Q.5@34.468,75.91 34.468,76.525 34.91,76.968 v1(34.91,77.867) ; D1M.5@34.468,82.774 34.468,83.389 34.91,83.831 v1(34.91,84.731) ; D1J.5@39.628,9.324 39.628,8.259 v1(40.57,7.317) ; D1F.5@39.628,16.187 39.628,15.123 v1(40.57,14.181) ; D1D.5@39.628,23.051 39.628,21.987 v1(40.57,21.044) ; D1A.5@39.63,30.957 39.63,31.572 40.073,32.015 v1@40.073,32.914 ; D1E.5@39.63,37.821 39.63,38.436 40.073,38.878 v1@40.073,39.778 ; D1U.5@39.63,51.549 39.63,52.164 40.073,52.606 v1@40.073,53.506 ; D1T.5@39.63,58.412 39.63,59.027 40.073,59.47 v1@40.073,60.369 ; D1P.5@39.63,65.276 39.63,65.891 40.073,66.334 v1@40.073,67.233 ; D1K.5@39.63,72.14 39.63,72.755 40.073,73.197 v1@40.073,74.097 ; D1O.5@39.63,79.004 39.63,79.619 40.073,80.061 v1@40.073,80.961
  L4 w0.5: v1(109.166,1.287) v1(109.166,3.855)
P3V3_MP: T_C3.2 T_C4.2 T_C8.2 T_C20.2 T_C22.2 T_C23.2 T_IC2.4 T_IC3.8 T_IC6.8 T_IC7.6 T_IC8.1 T_IC8.8 T_J1.30 T_R1.2 T_R2.2 T_R6.2 T_R8.2 T_R31.2 T_R32.2 T_R33.2 T_R34.2 T_TP3.1 | length 77.1
  L1 w0.2: T_IC8.1@181.161,2.402 181.555,2.402 181.705,2.553 181.705,2.835 181.939,3.069 T_C22.2@182.501,3.069
  L1 w0.254: T_C20.2@160.853,0.772 T_IC7.6@162.201,0.772 ; T_R6.2@173.858,11.304 173.858,12.615 174.148,12.325 T_C4.2@175.39,12.325 ; T_IC3.8@176.716,12.797 176.716,12.498 176.543,12.325 T_C4.2@175.39,12.325 ; T_IC2.4@177.321,11.047 176.498,11.047 175.998,10.547 T_C3.2@175.39,10.547 T_C4.2@175.39,12.325 ; T_IC8.8@181.127,1.829 T_C23.2@182.513,1.829 ; T_C22.2@182.501,3.069 T_C22.2@182.522,3.09 T_C23.2@182.522,1.82
  L1 w0.35: T_IC6.8@109.043,11.079 108.607,11.079 108.557,11.029 T_C8.2@108.557,9.545 108.557,8.902 108.848,8.611 112.753,8.611 ; T_R1.2@111.888,7.264 v1(112.54,7.264) v1(113.032,7.756) 113.032,8.332 112.753,8.611 ; T_R8.2@112.753,9.545 112.753,8.611 ; T_C20.2@160.853,0.772 v1(160.853,1.423) ; T_R2.2@181.899,14.556 182.627,14.556 182.949,14.235 v1(182.949,12.077) ; T_C22.2@182.522,3.09 v1(182.521,3.742) ; v1(182.949,6.807) T_R31.2@183.6,6.807 ; v1(182.949,7.861) T_R32.2@183.6,7.861 ; v1(182.949,8.915) T_R33.2@183.6,8.915 ; v1(182.949,9.969) T_R34.2@183.6,9.969
  L1 w0.5: T_TP3.1@173.858,12.797 173.858,13.964 174.352,14.458 v1@177.787,14.458 ; v1(182.949,12.077) 185.41,14.538 188.082,14.538 189.53,15.987 189.53,19.18 T_J1.30@191.27,20.92
  L4 w0.35: v1(160.853,1.423) 179.508,1.423 ; 181.957,3.218 182.481,3.742 v1(182.521,3.742) 182.521,3.782 182.158,4.146 182.158,6.015 v1(182.949,6.807) v1(182.949,7.861) v1(182.949,8.915) v1(182.949,9.969)
  other v1: 182.949,11.023 184.003,11.55 177.787,14.449 176.733,14.976 177.787,15.503
P3V3_MP2: T_C5.2 T_C6.2 T_IC4.4 T_IC5.8 T_J2.30 T_R9.2 T_TP4.1 | length 24.4
  L1 w0.254: T_R9.2@165.349,11.304 165.349,12.615 165.639,12.325 T_C6.2@166.881,12.325 ; T_IC5.8@168.207,12.797 168.207,12.498 168.034,12.325 T_C6.2@166.881,12.325 ; T_IC4.4@168.812,11.047 167.989,11.047 167.489,10.547 T_C5.2@166.881,10.547 T_C6.2@166.881,12.325
  L1 w0.5: T_TP4.1@165.349,12.615 T_TP4.1@165.349,12.797 165.349,13.964 168.227,16.842 173.337,16.842 176.247,19.752 176.247,20.896 T_J2.30@176.27,20.92
P3V3_MP3: T_C7.2 T_C9.2 T_IC9.4 T_IC10.8 T_J3.30 T_R10.2 T_TP5.1 | length 18.7
  L1 w0.254: T_R10.2@156.84,11.304 156.84,12.615 157.13,12.325 T_C9.2@158.372,12.325 ; T_IC10.8@159.698,12.797 159.698,12.498 159.525,12.325 T_C9.2@158.372,12.325 ; T_IC9.4@160.303,11.047 159.48,11.047 158.98,10.547 T_C7.2@158.372,10.547 T_C9.2@158.372,12.325
  L1 w0.5: T_TP5.1@156.84,12.615 T_TP5.1@156.84,12.797 156.84,13.964 161.27,18.394 T_J3.30@161.27,20.92
P12V0: C67.2 C68.2 IC27.2 T_C1.2 T_IC1.1 T_J1.28 T_J1.29 T_J2.28 T_J2.29 T_J3.28 T_J3.29 T_J4.A1 T_J4.D1 T_J4.E1 T_J4.G1 T_J4.H1 T_J4.J1 T_J4.K1 T_R3.2 T_R4.1 T_R29.1 T_TP1.1 | length 112.6
  L1 w0.152: T_J3.29@158.698,20.874 T_J3.29@158.73,20.842 ; T_R4.1@180.501,22.184 180.501,19.818 181.015,19.303 183.523,19.303 184.087,19.867 184.431,19.867 T_C1.2@184.83,20.266
  L1 w0.3: IC27.2@112.419,3.069 C67.2@113.382,3.069 ; T_TP1.1@115.062,5.227 115.45,5.615 T_R3.2@115.45,6.818
  L1 w0.4: T_J3.29@158.73,20.842 158.73,17.836 154.906,14.012 154.906,5.485 155.694,4.697 163.717,4.697 164.214,4.2 T_R29.1@164.214,3.334
  L1 w0.5: C67.2@113.608,2.913 114.595,2.913 C68.2@114.887,2.621 ; C68.2@115.062,2.681 T_TP1.1@115.062,5.227 ; T_J3.28@161.27,23.46 161.305,23.425 162.296,23.425 162.843,22.878 ; T_IC1.1@183.055,20.766 183.055,20.531 183.105,20.481 184.616,20.481 T_C1.2@184.83,20.266 186.196,20.266 186.85,20.92 T_J1.29@188.73,20.92
  L4 w0.152: T_J2.29@173.73,20.92 T_J2.28@176.27,23.46 178.81,20.92 T_J1.29@188.73,20.92 T_J1.28@191.27,23.46 192.924,21.807 192.924,1.75 196.82,-2.146 209.504,-2.146 T_J4.D1@210.6,-1.05
  other v1: 118.656,-0.752 117.602,-0.225 118.656,0.302 117.602,0.829 118.656,1.356 172.36,18.031 171.306,18.558 173.414,18.558 172.36,19.085 171.306,19.612 173.414,19.612 172.36,20.139 157.417,20.466 171.306,20.666 156.362,20.993 172.36,21.193 157.417,21.52 159.999,21.639 162.334,21.875 162.881,22.275 159.999,22.694 162.461,22.929
PGOOD: IC27.7 R1.1 T_T1.1 | length 4.7
  L1 w0.152: T_T1.1@107.576,4.457 107.711,4.592 108.366,4.592 108.613,4.84 108.613,5.427 108.827,5.641 R1.1@108.83,5.641 108.85,5.641 109.063,5.427 109.063,4.707 109.701,4.069 IC27.7@110.319,4.069
PSU_EN: IC27.3 T_IC6.3 T_IC7.1 T_LD1.3 T_R8.1 | length 226.8
  L1 w0.152: T_LD1.3@4.18,45.95 5.414,47.184 25.398,47.184 29.775,42.808 v1(29.775,-1.264) ; IC27.3@112.419,3.569 112.965,3.569 113.201,3.806 v1(113.201,4.074) 113.659,4.532 113.659,6.124 113.3,6.484 113.3,7.214 113.693,7.608 T_R8.1@113.693,9.545 113.693,10.091 113.439,10.346 112.728,10.346 112.51,10.563 112.51,12.183 112.706,12.379 T_IC6.3@113.693,12.379 ; v1(116.275,-0.669) 117.534,-1.928 T_IC7.1@162.201,-1.928
  L4 w0.152: v1(29.775,-1.264) 34.983,-1.264 36.569,0.322 85.962,0.322 92.069,6.429 101.865,6.429 103.233,5.06 105.524,5.06 108.2,7.736 110.502,7.736 113.201,5.037 v1(113.201,4.074) 116.275,1 v1(116.275,-0.669)
RSTn: T_D6.1 T_R15.1 | length 24.8
  L1 w0.152: T_D6.1@167.208,-1.928 169.016,-1.928 169.505,-2.417 177.131,-2.417 178.09,-1.458 178.09,3.576 178.64,4.127 181.577,4.127 183.202,5.752 T_R15.1@185.51,5.752
RX_EN: IC20A.3 IC20B.3 IC20C.3 IC20E.3 IC20G.3 IC20I.3 IC20K.3 IC20M.3 IC20N.3 IC20O.3 IC20P.3 IC20Q.3 IC20R.3 IC20S.3 IC20T.3 IC20U.3 R8.2 | length 202.3
  L1 w0.152: R8.2@33.795,2.044 33.258,2.044 31.586,3.717 31.586,17.294 ; IC20B.3@34.718,18.66 34.718,17.594 34.417,17.294 31.586,17.294 ; IC20C.3@34.718,39.251 34.718,38.186 34.417,37.886 31.586,37.886 ; 34.718,51.615 IC20N.3@34.718,52.979 34.718,53.546 34.824,53.652 35.434,53.652 35.827,53.259 36.317,53.259 36.65,53.592 36.65,55.465 36.378,55.737 36.297,55.737 v1(36.038,55.996) ; IC20M.3@34.718,80.434 34.718,79.38 34.451,79.114 32.676,79.114 31.586,78.023 31.586,72.205 ; v1(36.038,28.541) 36.297,28.282 36.378,28.282 36.65,28.01 36.65,26.137 36.317,25.804 35.827,25.804 35.434,26.197 34.824,26.197 34.718,26.09 IC20I.3@34.718,25.524 34.718,24.458 34.417,24.158 31.586,24.158 ; v1(36.038,35.405) 36.297,35.145 36.378,35.145 36.65,34.873 36.65,33.001 36.317,32.668 35.827,32.668 35.434,33.06 34.824,33.06 34.718,32.954 IC20G.3@34.718,32.387 34.718,31.322 34.417,31.022 31.586,31.022 ; v1(36.038,62.86) 36.297,62.601 36.378,62.601 36.65,62.329 36.65,60.456 36.317,60.123 35.827,60.123 35.434,60.516 34.824,60.516 34.718,60.41 IC20R.3@34.718,59.843 34.718,58.777 34.417,58.477 31.586,58.477 ; v1(36.038,69.724) 36.297,69.465 36.378,69.465 36.65,69.193 36.65,67.32 36.317,66.987 35.827,66.987 35.434,67.379 34.824,67.379 34.718,67.273 IC20S.3@34.718,66.706 34.718,65.641 34.417,65.341 31.586,65.341 ; v1(36.038,76.588) 36.297,76.328 36.378,76.328 36.65,76.056 36.65,74.184 36.317,73.851 35.827,73.851 35.434,74.243 34.824,74.243 34.718,74.137 IC20Q.3@34.718,73.57 34.718,72.505 34.417,72.205 31.586,72.205 ; IC20A.3@39.88,28.667 39.88,29.234 39.986,29.34 40.597,29.34 v1(41.187,28.75) ; IC20E.3@39.88,35.531 39.88,36.098 39.986,36.204 40.597,36.204 v1(41.187,35.614) ; IC20U.3@39.88,49.259 39.88,48.193 39.58,47.893 38.438,47.893 34.718,51.613 31.586,51.613 ; IC20T.3@39.88,56.122 39.88,56.689 39.986,56.795 40.597,56.795 v1(41.187,56.205) ; IC20P.3@39.88,62.986 39.88,63.553 39.986,63.659 40.597,63.659 v1(41.187,63.069) ; IC20K.3@39.88,69.85 39.88,70.417 39.986,70.523 40.597,70.523 v1(41.187,69.933) ; IC20O.3@39.88,76.714 39.88,77.281 39.974,77.374 40.62,77.374 41.187,76.807 v1(41.187,76.796) ; 31.586,17.294 31.586,24.158 ; 31.586,24.158 31.586,31.022 ; 31.586,31.022 31.586,37.886 ; 31.586,37.886 31.586,51.613 ; 31.586,51.613 31.586,58.477 ; 31.586,58.477 31.586,65.341 ; 31.586,65.341 31.586,72.205
  L4 w0.152: v1(36.038,28.541) 40.419,28.541 40.628,28.75 v1(41.187,28.75) ; v1(36.038,35.405) 40.419,35.405 40.628,35.614 v1(41.187,35.614) ; v1(36.038,55.996) 40.419,55.996 40.628,56.205 v1(41.187,56.205) ; v1(36.038,62.86) 40.419,62.86 40.628,63.069 v1(41.187,63.069) ; v1(36.038,69.724) 40.419,69.724 40.628,69.933 v1(41.187,69.933) ; v1(36.038,76.588) 40.419,76.588 40.628,76.796 v1(41.187,76.796)
SB_0: T_J4.I2
SB_1: T_J4.G3
SB_2: T_J4.H3
SB_3: T_J4.J3
SB_4: T_J4.K3
SERRX_N: D1B.3 IC20B.1 J1.19 R131B.1 | length 52.8
  L1 w0.127: J1.19@-3.81,23.73 -1.857,23.73 -0.703,22.577 -0.629,22.502 0.493,22.502 1.55,23.559 4.704,23.559 4.89,23.374 v1(4.965,23.374) ; R131B.1@32.709,19.744 32.872,19.906 v1@33.465,19.906 ; v1@33.471,19.903 33.718,19.656 IC20B.1@33.718,18.66
  L4 w0.127: v1(4.965,23.374) 5.04,23.374 5.226,23.559 5.841,23.559 9.321,20.079 11.732,20.079 11.922,20.079 ccw(c11.922,20.758) 12.602,20.758 12.602,20.975 cw(c13.027,20.975) 13.027,21.4 14.303,21.4 cw(c14.303,20.975) 14.729,20.975 14.729,19.546 ccw(c15.408,19.546) 15.408,18.867 16.684,18.867 ccw(c16.684,19.546) 17.364,19.546 17.364,20.975 cw(c17.789,20.975) 17.789,21.4 19.065,21.4 cw(c19.065,20.975) 19.491,20.975 19.491,19.546 ccw(c20.17,19.546) 20.17,18.867 21.446,18.867 ccw(c21.446,19.546) 22.126,19.546 22.126,20.975 cw(c22.551,20.975) 22.551,21.4 23.827,21.4 cw(c23.827,20.975) 24.253,20.975 24.253,20.758 ccw(c24.932,20.758) 24.932,20.079 26.974,20.079 29.857,20.079 29.86,20.082 33.204,20.082 33.39,19.896 v1(33.465,19.896) 33.566,19.896 33.821,19.641 33.881,19.641 33.968,19.555 D1B.3@33.968,19.42
SERRX_P: D1B.4 IC20B.8 J1.6 R131B.2 | length 52.8
  L1 w0.127: J1.6@0,23.73 -1.243,23.73 -1.318,23.656 -1.318,23.55 -0.524,22.756 0.388,22.756 1.444,23.813 2.33,23.813 2.568,23.813 ccw(c2.568,23.94) 2.695,23.94 2.695,24.408 cw(c2.821,24.408) 2.821,24.534 3.197,24.534 cw(c3.197,24.408) 3.322,24.408 3.322,23.94 ccw(c3.449,23.94) 3.449,23.813 4.14,23.813 4.704,23.813 4.89,23.999 v1(4.965,23.999) ; R131B.2@32.709,20.684 32.88,20.513 33.465,20.513 v1(33.465,20.522) 33.465,20.524 33.718,20.776 IC20B.8@33.718,21.76
  L4 w0.127: v1(4.965,23.999) 5.04,23.999 5.226,23.813 5.946,23.813 9.427,20.333 11.732,20.333 11.922,20.333 ccw(c11.922,20.758) 12.348,20.758 12.348,20.975 cw(c13.027,20.975) 13.027,21.654 14.303,21.654 cw(c14.303,20.975) 14.983,20.975 14.983,19.546 ccw(c15.408,19.546) 15.408,19.121 16.684,19.121 ccw(c16.684,19.546) 17.11,19.546 17.11,20.975 cw(c17.789,20.975) 17.789,21.654 19.065,21.654 cw(c19.065,20.975) 19.745,20.975 19.745,19.546 ccw(c20.17,19.546) 20.17,19.121 21.446,19.121 ccw(c21.446,19.546) 21.872,19.546 21.872,20.975 cw(c22.551,20.975) 22.551,21.654 23.827,21.654 cw(c23.827,20.975) 24.507,20.975 24.507,20.758 ccw(c24.932,20.758) 24.932,20.333 26.974,20.333 29.752,20.333 29.755,20.336 33.204,20.336 33.39,20.522 v1(33.465,20.522) 33.566,20.522 33.822,20.778 33.881,20.778 33.968,20.865 D1B.4@33.968,21
SERTX_N: D1D.6 IC20D.5 J1.7 | length 52
  L1 w0.127: v1(38.625,23.529) 38.7,23.529 38.886,23.715 39.061,23.715 39.135,23.64 39.135,23.273 39.001,23.139 39.001,22.624 38.88,22.503 IC20D.5@38.88,22.228
  L4 w0.127: J1.7@1.905,25 0.662,25 0.587,25.074 0.587,25.18 1.381,25.974 2.426,25.974 3.116,25.974 cw(c3.116,25.847) 3.243,25.847 3.243,25.702 ccw(c3.369,25.702) 3.369,25.577 3.745,25.577 ccw(c3.745,25.702) 3.87,25.702 3.87,25.848 cw(c3.996,25.848) 3.996,25.974 4.372,25.974 cw(c4.372,25.848) 4.497,25.848 4.497,25.702 ccw(c4.623,25.702) 4.623,25.577 4.999,25.577 ccw(c4.999,25.702) 5.124,25.702 5.124,25.847 cw(c5.251,25.847) 5.251,25.974 5.523,25.974 5.588,25.974 7.847,23.715 11.597,23.715 11.788,23.715 ccw(c11.788,24.394) 12.467,24.394 12.467,24.455 cw(c12.892,24.455) 12.892,24.881 14.169,24.881 cw(c14.169,24.455) 14.594,24.455 14.594,23.78 ccw(c15.273,23.78) 15.273,23.101 16.55,23.101 ccw(c16.55,23.78) 17.229,23.78 17.229,24.455 cw(c17.654,24.455) 17.654,24.881 18.931,24.881 cw(c18.931,24.455) 19.356,24.455 19.356,23.78 ccw(c20.035,23.78) 20.035,23.101 21.312,23.101 ccw(c21.312,23.78) 21.991,23.78 21.991,24.455 cw(c22.416,24.455) 22.416,24.881 23.693,24.881 cw(c23.693,24.455) 24.118,24.455 24.118,24.394 ccw(c24.797,24.394) 24.797,23.715 26.787,23.715 36.318,23.715 36.689,23.715 cw(c36.689,23.588) 36.816,23.588 36.816,23.493 ccw(c36.941,23.493) 36.941,23.368 37.317,23.368 ccw(c37.317,23.493) 37.443,23.493 37.443,23.588 cw(c37.57,23.588) 37.57,23.715 37.633,23.715 38.364,23.715 38.55,23.529 v1(38.625,23.529) 38.726,23.529 38.982,23.273 39.041,23.273 39.128,23.186 D1D.6@39.128,23.051
SERTX_P: D1D.1 IC20D.6 J1.20 | length 52
  L1 w0.127: v1(38.625,24.155) 38.7,24.155 38.886,23.969 39.166,23.969 39.389,23.746 39.389,23.168 39.255,23.033 39.255,22.629 39.38,22.503 IC20D.6@39.38,22.228
  L4 w0.127: J1.20@-1.905,25 0.048,25 1.202,26.153 1.276,26.228 5.693,26.228 7.952,23.969 9.971,23.969 11.597,23.969 11.788,23.969 ccw(c11.788,24.394) 12.213,24.394 12.213,24.455 cw(c12.892,24.455) 12.892,25.135 14.169,25.135 cw(c14.169,24.455) 14.848,24.455 14.848,23.78 ccw(c15.273,23.78) 15.273,23.355 16.55,23.355 ccw(c16.55,23.78) 16.975,23.78 16.975,24.455 cw(c17.654,24.455) 17.654,25.135 18.931,25.135 cw(c18.931,24.455) 19.61,24.455 19.61,23.78 ccw(c20.035,23.78) 20.035,23.355 21.312,23.355 ccw(c21.312,23.78) 21.737,23.78 21.737,24.455 cw(c22.416,24.455) 22.416,25.135 23.693,25.135 cw(c23.693,24.455) 24.372,24.455 24.372,24.394 ccw(c24.797,24.394) 24.797,23.969 26.787,23.969 38.364,23.969 38.55,24.155 v1(38.625,24.155) 38.726,24.155 38.981,24.41 39.041,24.41 39.128,24.496 D1D.1@39.128,24.631
SERVMOD_3V3: T_IC8.5 T_R17.1 T_R19.2 | length 12.1
  L1 w0.152: v1(178.811,0.487) 178.811,1.894 T_R19.2@178.773,1.932 178.987,2.146 179.18,2.146 179.436,2.402 T_IC8.5@180.051,2.402 ; v1(182.972,4.388) 183.282,4.698 T_R17.1@185.51,4.698
  L4 w0.152: v1(178.811,0.487) 180.386,0.487 182.972,3.073 v1(182.972,4.388)
STRIP1: T_B7.1 T_B8.1 T_C12.1 T_M1.1 T_M2.1 T_M3.1 T_M4.1 T_R26.1 T_R28.2 | length 483.5
  L1 w0.5: -2.719,2.898 -2.719,4.179 -5.253,6.712 -5.253,82.134 -2.718,84.668 -2.718,86.182 T_B8.1@0,88.9 ; T_B7.1@0,0 T_C12.1@4.25,0
  L1 w0.6: T_B8.1@0,88.9 T_R26.1@4.152,88.9 ; 35.051,-3.382 T_R28.2@35.051,-1.354
  L4 w0.5: T_B7.1@0,0 2.589,-2.589 95.011,-2.589 T_M3.1@97.6,0 100.189,-2.589 185.011,-2.589 T_M4.1@187.6,0 ; T_B8.1@0,88.9 2.631,91.531 94.969,91.531 T_M1.1@97.6,88.9 ; T_M1.1@97.558,88.9 T_M1.1@97.6,88.9 ; T_M2.1@187.6,88.9 184.969,91.531 100.231,91.531 T_M1.1@97.6,88.9
  other v1: -1.5,-4.1 4.333,-4.1 10.167,-4.1 16,-4.1 21.833,-4.1 27.667,-4.1 33.5,-4.1
STRIP2: T_R27.1 | length 1.9
  L1 w0.6: 68.514,-3.255 T_R27.1@68.514,-1.354
  other v1: 43,-4.1 48.789,-4.1 54.578,-4.1 60.367,-4.1 66.156,-4.1 71.944,-4.1 77.733,-4.1 83.522,-4.1 89.311,-4.1 95.1,-4.1
STRIP3: T_R28.1 | length 2
  L1 w0.5: T_R28.1@36.984,-1.829 v1(37.84,-1.829) ; T_R28.1@36.984,-0.878 v1(37.84,-0.878)
  L1 w0.9: T_R28.1@36.947,-1.419 36.947,-1.194 T_R28.1@36.997,-1.144
  other v1: 117.856,-4.1 122.1,-4.1 127.933,-4.1 133.767,-4.1 139.6,-4.1 145.433,-4.1 151.267,-4.1 157.1,-4.1 162.1,-4.1 167.933,-4.1 173.767,-4.1 179.6,-4.1 185.433,-4.1 191.267,-4.1 197.1,-4.1 203.033,-4.1 208.867,-4.1 214.7,-4.1
TX_EN: IC20D.3 IC20F.3 IC20H.3 IC20J.3 IC20L.3 R9.2 | length 45.5
  L1 w0.152: R9.2@33.795,3.109 33.232,3.109 32.23,4.111 32.23,8.203 ; v1(36.038,21.677) 36.119,21.677 36.65,21.146 36.65,18.244 36.636,18.229 ; v1(38.058,22.324) v1@38.047,22.324 ; v1@38.06,22.311 v1@38.047,22.324 ; IC20J.3@39.38,11.601 39.38,11.021 39.291,10.932 38.644,10.932 38.21,11.366 37.726,11.366 36.203,9.843 34.53,9.843 34.218,9.531 IC20L.3@34.218,8.457 34.218,7.878 34.128,7.788 33.481,7.788 33.067,8.203 32.23,8.203 ; IC20F.3@39.38,18.464 39.38,17.885 39.291,17.796 38.644,17.796 38.21,18.229 36.636,18.229 ; IC20D.3@39.38,25.328 39.38,24.761 39.274,24.655 38.664,24.655 38.271,25.048 37.715,25.048 37.445,24.778 37.445,22.905 38.026,22.324 v1@38.047,22.324 ; 32.23,8.203 32.23,14.759 32.531,15.06 33.089,15.06 33.501,14.648 34.112,14.648 34.218,14.754 IC20H.3@34.218,15.321 34.218,16.395 34.53,16.707 35.113,16.707 36.636,18.229
  L4 w0.152: v1(36.038,21.677) 36.388,22.027 37.761,22.027 v1(38.058,22.324)
X0_N: D1C.3 IC20C.1 J1.25 R131C.1 | length 51.2
  L1 w0.127: R131C.1@32.709,40.327 32.88,40.498 33.465,40.498 v1(33.465,40.488) ; v1(33.465,40.488) 33.718,40.235 IC20C.1@33.718,39.251
  L4 w0.127: J1.25@-3.81,31.35 -1.857,31.35 -0.703,30.197 -0.629,30.122 0.464,30.122 1.532,31.19 2.449,31.19 3.082,31.823 3.653,32.394 3.653,34.587 9.74,40.674 11.233,40.674 12.497,40.674 ccw(c12.497,41.353) 13.176,41.353 13.176,42.133 cw(c13.602,42.133) 13.602,42.558 14.878,42.558 cw(c14.878,42.133) 15.303,42.133 15.303,40.141 ccw(c15.983,40.141) 15.983,39.462 17.259,39.462 ccw(c17.259,40.141) 17.938,40.141 17.938,40.248 cw(c18.364,40.248) 18.364,40.674 18.554,40.674 33.204,40.674 33.39,40.488 v1(33.465,40.488) 33.566,40.488 33.821,40.233 33.881,40.233 33.968,40.146 D1C.3@33.968,40.011
X0_P: D1C.4 IC20C.8 J1.12 R131C.2 | length 51.2
  L1 w0.127: R131C.2@32.709,41.267 32.872,41.104 v1@33.465,41.104 ; v1@33.468,41.104 33.718,41.354 IC20C.8@33.718,42.351
  L4 w0.127: J1.12@0,31.35 -1.243,31.35 -1.318,31.276 -1.318,31.17 -0.524,30.376 0.359,30.376 1.427,31.444 2.344,31.444 3.399,32.499 3.399,32.697 3.399,33.359 ccw(c3.272,33.359) 3.272,33.486 2.826,33.486 cw(c2.826,33.611) 2.701,33.611 2.701,33.988 cw(c2.826,33.988) 2.826,34.113 3.272,34.113 ccw(c3.272,34.24) 3.399,34.24 3.399,34.692 3.765,35.058 9.635,40.928 11.233,40.928 12.497,40.928 ccw(c12.497,41.353) 12.922,41.353 12.922,42.133 cw(c13.602,42.133) 13.602,42.812 14.878,42.812 cw(c14.878,42.133) 15.557,42.133 15.557,40.141 ccw(c15.983,40.141) 15.983,39.716 17.259,39.716 ccw(c17.259,40.141) 17.684,40.141 17.684,40.248 cw(c18.364,40.248) 18.364,40.928 18.554,40.928 33.204,40.928 33.39,41.113 v1(33.465,41.113) 33.566,41.113 33.822,41.37 33.881,41.37 33.968,41.456 D1C.4@33.968,41.591
X1_N: D1E.3 IC20E.1 J1.24 R131E.1 | length 51.3
  L1 w0.127: J1.24@-1.905,30.08 0.048,30.08 1.373,31.405 1.447,31.479 2.31,31.479 3.683,32.852 4.45,32.852 4.79,32.512 4.79,32.093 4.976,31.908 v1(4.976,31.832) ; R131E.1@37.872,36.607 38.042,36.778 38.628,36.778 v1(38.628,36.768) ; v1(38.628,36.768) 38.88,36.515 IC20E.1@38.88,35.531
  L4 w0.127: v1(4.976,31.832) 4.976,31.908 4.79,32.093 4.79,32.912 9.33,37.452 10.215,37.452 12.294,37.452 cw(c12.294,37.026) 12.719,37.026 12.719,36.451 ccw(c13.398,36.451) 13.398,35.772 14.675,35.772 ccw(c14.675,36.451) 15.354,36.451 15.354,37.026 cw(c15.779,37.026) 15.779,37.452 15.97,37.452 36.143,37.452 36.691,36.904 38.367,36.904 38.553,36.718 38.729,36.718 38.984,36.463 39.044,36.463 39.13,36.376 D1E.3@39.13,36.241
X1_P: D1E.4 IC20E.8 J1.11 R131E.2 | length 51.2
  L1 w0.127: J1.11@1.905,30.08 0.662,30.08 0.587,30.154 0.587,30.26 1.553,31.225 1.927,31.225 2.415,31.225 2.749,31.559 cw(c2.839,31.469) 2.928,31.559 3.234,31.253 ccw(c3.323,31.342) 3.411,31.253 3.677,31.519 ccw(c3.589,31.608) 3.677,31.697 3.372,32.002 cw(c3.462,32.092) 3.372,32.182 3.614,32.424 3.788,32.598 4.345,32.598 4.536,32.407 4.536,32.093 4.351,31.908 v1(4.351,31.832) ; R131E.2@37.872,37.547 38.034,37.384 v1@38.628,37.384 ; v1@38.63,37.384 38.88,37.634 IC20E.8@38.88,38.631
  L4 w0.127: v1(4.351,31.832) 4.351,31.908 4.536,32.093 4.536,33.017 9.225,37.706 10.215,37.706 12.294,37.706 cw(c12.294,37.026) 12.973,37.026 12.973,36.451 ccw(c13.398,36.451) 13.398,36.026 14.675,36.026 ccw(c14.675,36.451) 15.1,36.451 15.1,37.026 cw(c15.779,37.026) 15.779,37.706 15.97,37.706 36.248,37.706 36.796,37.158 38.367,37.158 38.553,37.343 38.729,37.343 38.985,37.6 39.044,37.6 39.13,37.686 D1E.4@39.13,37.821
  other v1: 38.628,37.393
X2_N: D1G.3 IC20G.1 J1.23 R131G.1 | length 51.2
  L1 w0.127: R131G.1@32.709,33.463 32.88,33.634 33.465,33.634 v1(33.465,33.624) 33.718,33.371 IC20G.1@33.718,32.387
  L4 w0.127: J1.23@-3.81,28.81 -1.857,28.81 -0.661,27.614 -0.587,27.54 0.422,27.54 1.532,28.65 4.028,28.65 9.189,33.81 18.221,33.81 19.327,33.81 ccw(c19.327,34.489) 20.007,34.489 20.007,34.717 cw(c20.432,34.717) 20.432,35.143 21.708,35.143 cw(c21.708,34.717) 22.134,34.717 22.134,33.277 ccw(c22.813,33.277) 22.813,32.598 24.089,32.598 ccw(c24.089,33.277) 24.769,33.277 24.769,34.717 cw(c25.194,34.717) 25.194,35.143 26.47,35.143 cw(c26.47,34.717) 26.896,34.717 26.896,33.277 ccw(c27.575,33.277) 27.575,32.598 28.851,32.598 ccw(c28.851,33.277) 29.531,33.277 29.531,33.384 cw(c29.956,33.384) 29.956,33.81 30.147,33.81 33.204,33.81 33.39,33.624 v1(33.465,33.624) 33.566,33.624 33.821,33.369 33.881,33.369 33.968,33.282 D1G.3@33.968,33.147